# Altium PCB PCB1.PcbDoc
Units mil, origin at the board's own origin, x right, y up, seen from the top; angles counter-clockwise.
Board outline 6000 x 4000 mil, 2 copper layers (Top Layer, Bottom Layer); 41 components, 25 nets, 103 pads, 0 vias.
Unrouted connection lines stored in the file: 69.
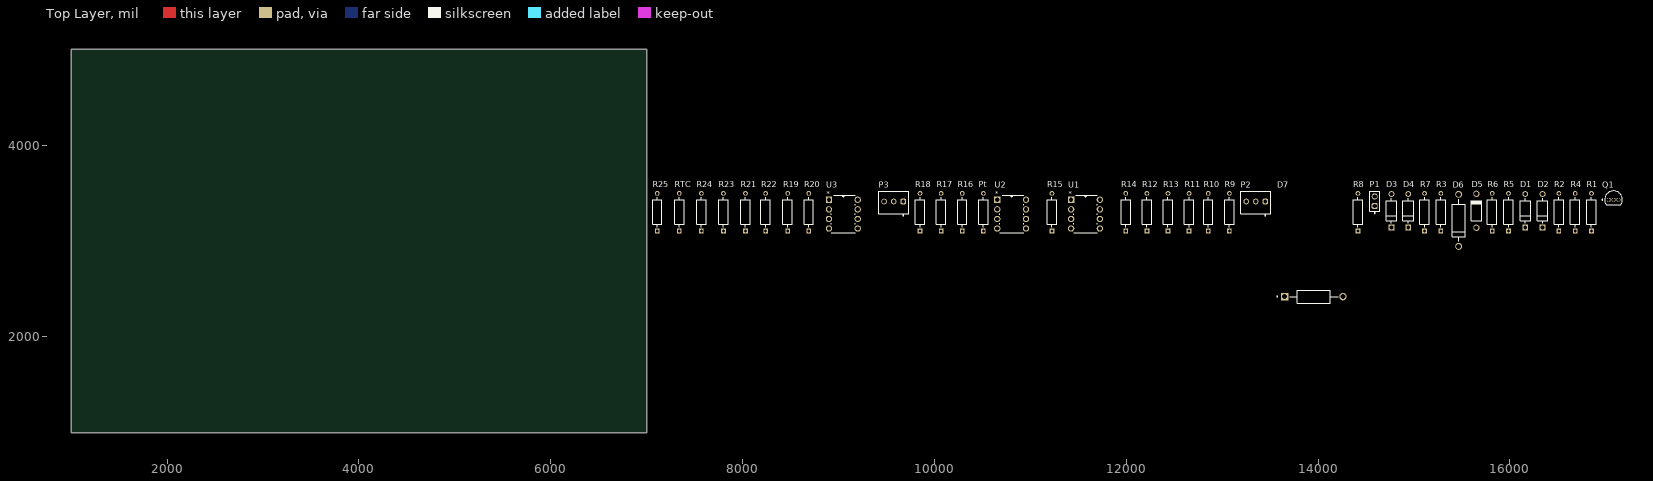
[diagram p0: Top Layer view]
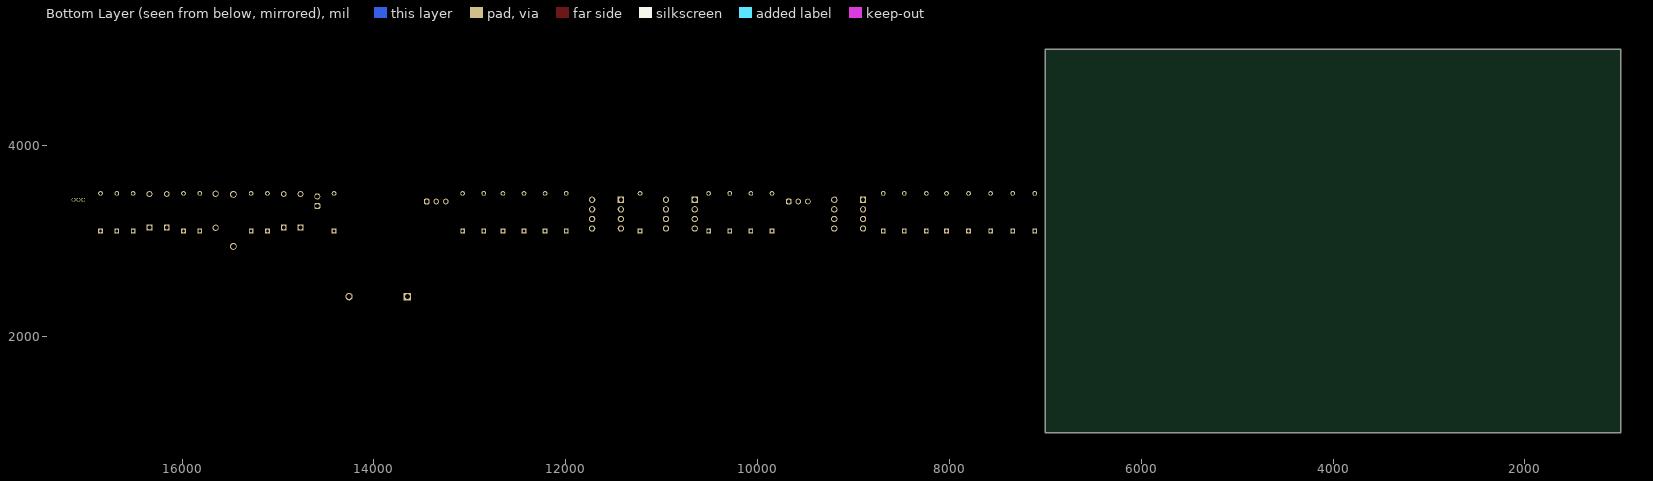
[diagram p1: Bottom Layer view, seen from below]

## Layer stack, top to bottom
Top Solder: solder mask 0.4, Solder Resist, Dk 3.5
Top Layer: signal copper 1.4
Dielectric 1: dielectric 12.6, FR-4, Dk 4.8
Bottom Layer: signal copper 1.4
Bottom Solder: solder mask 0.4, Solder Resist, Dk 3.5

## Board outline
1000,1000 7000,1000 7000,5000 1000,5000

## Design rules (kind name [scope] priority, off if disabled: settings)
Clearance [All] p1: gap=10 ignorepadtopadclearanceinfootprint=FALSE
PolygonConnect [All] p1: connectstyle=Relief reliefconductorwidth=10 reliefentries=4 polygonreliefangle="90 Angle" airgapwidth=10
RoutingVias [All] p1: holewidth=28 width=50 viastyle="Through Hole" minholewidth=28 minwidth=50 maxholewidth=28 maxwidth=50
SolderMaskExpansion [All] p1: expansion=4 istentingtop=FALSE
Width [All] p1: maxlimit=10 minlimit=10 preferedwidth=10
30 further rules are at their usual default settings.

## Components (designator, comment, footprint, x,y, rotation, side; value= is the part's Value field where it differs from the comment)
D1 "1N4007" FP-1N4007-MFG 16160,3315 r90 top value=15pF
D2 "1N4007" FP-1N4007-MFG 16340,3315 r90 top value=15pF
D3 "1N4007" FP-1N4007-MFG 14765,3315 r90 top value=15pF
D4 "1N4007" FP-1N4007-MFG 14940,3315 r90 top value=15pF
D5 "5.6" FAIR-DO-41-2_V 15650,3315 r90 top
D6 "1N5359BRLG" ONSC-SURMETIC40-2-017AA-01 15465,3215 r90 top
D7 "12V" DIOAD1543W101L863D368 13955,2420 r0 top
P1 "61300211121" 61300211121 14590,3415 r90 top
P2 "61900311121" 61900311121 13350,3400 r0 top
P3 "61900311121" 61900311121 9575,3400 r0 top
Pt "10" FP-MRS25-MFG 10510,3300 r90 top
Q1 "P2N2222AG" ONSC-TO-92-3-29-11 17080,3430 r0 top
R1 "100" FP-MRS25-MFG 16850,3300 r90 top
R2 "50" FP-MRS25-MFG 16510,3300 r90 top
R3 "10k" FP-MRS25-MFG 15280,3300 r90 top
R4 "5k" FP-MRS25-MFG 16680,3300 r90 top
R5 "470" FP-MRS25-MFG 15985,3300 r90 top
R6 "2k" FP-MRS25-MFG 15815,3300 r90 top
R7 "10" FP-MRS25-MFG 15110,3300 r90 top
R8 "180" FP-MRS25-MFG 14415,3300 r90 top
R9 "1k" FP-MRS25-MFG 13075,3300 r90 top
R10 "100" FP-MRS25-MFG 12855,3300 r90 top
R11 "100" FP-MRS25-MFG 12655,3300 r90 top
R12 "10k" FP-MRS25-MFG 12215,3300 r90 top
R13 "10k" FP-MRS25-MFG 12435,3300 r90 top
R14 "1k" FP-MRS25-MFG 11995,3300 r90 top
R15 "10k" FP-MRS25-MFG 11225,3300 r90 top
R16 "100" FP-MRS25-MFG 10290,3300 r90 top
R17 "1k" FP-MRS25-MFG 10070,3300 r90 top
R18 "6.6k" FP-MRS25-MFG 9850,3300 r90 top
R19 "10K" FP-MRS25-MFG 8470,3300 r90 top
R20 "10" FP-MRS25-MFG 8690,3300 r90 top
R21 "1k" FP-MRS25-MFG 8030,3300 r90 top
R22 "10k" FP-MRS25-MFG 8240,3300 r90 top
R23 "10k" FP-MRS25-MFG 7800,3300 r90 top
R24 "10k" FP-MRS25-MFG 7570,3300 r90 top
R25 "10K" FP-MRS25-MFG 7110,3300 r90 top
RTC "10K" FP-MRS25-MFG 7340,3300 r90 top
U1 "AD744JNZ" DIP254P762X444-8 11725,3130 r0 top
U2 "AD744JNZ" DIP254P762X444-8 10955,3130 r0 top
U3 "AD744JNZ" DIP254P762X444-8 9200,3130 r0 top

## Footprints (in the part's own frame and the unit in brackets; to place one, negate y for a bottom-side part, rotate by r counter-clockwise, add the part's x,y. Pads: shape width x height; smd on the part's side, far side on the other; paste and mask are expansions set on the pad)
61300211121 [mm] "Pin Header, pitch 2.54 mm, THT, Vertical, single row, 2p"
  rrect50% 1.6x1.6 hole 1.1: 1(-1.27,0)
  round 1.6 hole 1.1: 2(1.27,0)
  silkscreen extent -3.26,-1.35 2.69,1.35, body extent -2.54,-1.27 2.54,1.27, height 8.57
61900311121 [mm] "2.54mm Male Locking Header, 3p"
  rrect50% 1.5x1.5 hole 1: 1(2.54,0.3)
  round 1.5 hole 1: 2(0,0.3) 3(-2.54,0.3)
  silkscreen extent -3.98,-3.52 3.98,2.98, body extent -3.81,-2.9 3.81,2.9, height 11.53
DIOAD1543W101L863D368 [mm]
  rect 1.94x1.94 / inner round 1.94 / far side rect 1.94x1.94 hole 1.29: 1(-7.715,0)
  round 1.94 hole 1.29: 2(7.715,0)
  silkscreen extent -9.78,-1.75 6.43,1.75, body extent -2.25,-34.4 2.25,28.1, height 2.25
DIP254P762X444-8 [mil]
  rect 66x66 / inner round 66 / far side rect 66x66 hole 44: 1(-300,300)
  round 66 hole 44: 2(-300,200) 3(-300,100) 4(-300,0) 5(0,0) 6(0,100) 7(0,200) 8(0,300)
  silkscreen extent -275,-45 -25,345, body extent -162,-189 162,189, height 210
FAIR-DO-41-2_V [mm] "2-Leads, Axial leaded, Body 2.72x5.2mm, Pin Spacing 9mm"
  round 1.65 hole 1.15: 1(-4.5,0) 2(4.5,0)
  silkscreen extent -2.6,-1.36 2.6,1.36, body extent -4.93,-1.36 4.93,1.36, height 2.71
FP-1N4007-MFG [mm]
  rect 1.55x1.55 hole 1 paste-2539.97 mask+0: 1(-4.44,0)
  round 1.55 hole 1 paste-2539.97 mask+0: 2(4.44,0)
  silkscreen extent -3.26,-1.4 3.26,1.4, body extent -5.32,-1.5 5.32,1.5, height 0.25
FP-MRS25-MFG [mm]
  rect 1.25x1.25 hole 0.75 paste-2539.97 mask+0: 1(-5,0)
  round 1.25 hole 0.75 paste-2539.97 mask+0: 2(5,0)
  silkscreen extent -3.98,-1.25 3.98,1.25, body extent -5.72,-1.35 5.72,1.35, height 0.25
ONSC-SURMETIC40-2-017AA-01 [mm] "AXIAL, 2-Leads, Diameter 3.49mm"
  round 1.8 hole 1.3: 1(-6.887,0) 2(6.887,0)
  silkscreen extent -5.59,-1.75 5.59,1.75
ONSC-TO-92-3-29-11 [mm] "TO, 3-Leads, Body Dia 4.7mm, Pitch 1.27mm"
  rect 1.05x1.05 hole 0.8: 1(-1.27,0)
  round 1.05 hole 0.8: 2(0,0) 3(1.27,0)
  silkscreen extent -3.07,-1.34 2.35,2.35, body extent -2.35,-1.33 2.36,2.36, height 7.87

## Part data
D1 D2 D3 D4: library part CMP-123542-000001-1, "Rectifier diode 1000 V 1 A DO-41, ,", Capacitance=15pF, Forward Current=1A, Manufacturer=Diotec, Max Junction Temp=+175°C, Max Repetitive Reverse Voltage=1000V, Max Surge Forward Current=27A, Peak Reverse Current=5uA, Temperature="-50°C to +175°C", Temperature Range Low=-50°C, Automotive=No, Category=Diode, ComponentLink2Description=Datasheet, ComponentLink2URL=https://datasheet.octopart.com/1N4007-Diotec-datasheet-62346875.pdf, Device Class L1="Discrete Semiconductors", Device Class L2=Diodes, Device Class L3="Rectifier Diodes", Height=2.8mm, Ipc Land Pattern Name=DIOAD888W100L520D280, Lead Free=Yes, Manufacturer Part Number=1N4007, Octopart=https://octopart.com/1n4007-diotec-4040411, Package=1N4007, Reverse Voltage=1000V, RoHS=TRUE, Temperature Range High=+175°C
D5: library part CMP-0892-00009-1, "Zener Diode, 5.6V, 1W, 5%, -65 to 200 degC, 2-Pin DO-41, Body 2.72 x 5.2 mm, RoHS", Manufacturer="Fairchild Semiconductor", Operating and Storage Temperature Range="-65 to 200 degC", PartNumber=1N4734A, Test Current IZ (mA)=45, Tolerance=5%, ComponentLink1Description="Manufacturer URL", ComponentLink1URL=http://www.fairchildsemi.com/, ComponentLink2Description=Datasheet, ComponentLink2URL=http://www.fairchildsemi.com/ds/1N/1N4744A.pdf, ComponentLink3Description="Package Specification", ComponentLink3URL=http://www.fairchildsemi.com/dwg/DO/DO41A.pdf, DatasheetVersion="Rev. H3", IR (uA)=10, Mounting Technology="Through Hole", PackageDescription="2-Pin Axial leaded, Body 2.72 x 5.2 mm, Lead Spread 25.4 mm", PackageReference=DO-41-2, PackageVersion="Rev. 2", PD (W)=1, RoHS=TRUE, VZ (Max.) (V)=5.88, VZ (Min.) (V)=5.32, ZZ (Max) (ohm)=5
D6: library part CMP-1060-01318-1, "5 W Zener Voltage Regulator, 2-Pin Surmetic(TM) 40, Pb-Free, Tape and Reel", Manufacturer="On Semiconductor", ComponentLink1Description="Manufacturer URL", ComponentLink1URL=http://www.onsemi.com/, ComponentLink2Description=Datasheet, ComponentLink2URL=http://www.onsemi.cn/pub_link/Collateral/1N5333B-D.PDF, ComponentLink3Description="Package Specification", ComponentLink3URL=http://www.onsemi.cn/pub_link/Collateral/017AA.PDF, DatasheetVersion="Rev. 14", Mounting Technology="Through Hole", P Max (W)=5, PackageDescription="2-Pin, Axial Lead, Diameter 3.49 mm", PackageReference=SURMETIC40-2-017AA-01, PackageVersion="Rev. O, 09/2005", Packing="Tape and Reel", PartNumber=1N5359BRLG, RoHS=Pb-Free, VZ Typ (V)=24
D7: library part 1N5349BRL, "Zener Diode Single 12V 5% 2.5Ohm 5000mW 2-Pin Case 017AA-01 T/R", Package=None, Check_prices=https://www.snapeda.com/parts/1N5349BRL/Onsemi/view-part/?ref=eda, MF="ON Semiconductor", MP=1N5349BRL, SnapEDA_Link=https://www.snapeda.com/parts/1N5349BRL/Onsemi/view-part/?ref=snap
P1: library part CMP-1712-00002-6, Color=Black, Contact Resistance=20mΩ, Current Rating=3A, Max Operating Temperature=125°C, Min Operating Temperature=-40°C, Operating Supply Voltage=250V, Connector Type="Male Pin", Contact Gender=Male, Contact Material=Copper, Contact Mating Length=5.9944mm, Contact Plating=Gold, Gender=Male, Height=8.94mm, Housing Material=PBT, Lead Free="Lead Free", Lead Pitch=2.54mm, Mount="Through Hole", NexarPartId=20081794, Number of Contacts=2, Number of Pins=2, Number of Positions=2, Number of Rows=1, Orientation=Vertical, Packaging=Bulk, Pitch=2.54mm, REACH SVHC="No SVHC", RoHS=Compliant, Termination="Through Hole", Voltage Rating=250V
P2 P3: library part CMP-1502-00585-2, Color=Beige, Contact Resistance=20mΩ, Current Rating=3A, Flammability Rating="UL94 V-0", Insulation Resistance=1GΩ, Max Operating Temperature=105°C, Min Operating Temperature=-40°C, Operating Supply Voltage=250V, Connector Type="Male Pin", Contact Gender=Male, Contact Material=Copper, Contact Mating Length=7.493mm, Contact Plating=Tin, Fastening Type=Friction, Gender=Male, Height=12.5mm, Housing Material=Nylon, Lead Pitch=2.54mm, Length=7.62mm, Mount="Through Hole", NexarPartId=18818222, Number of Contacts=3, Number of Pins=3, Number of Positions=3, Number of Rows=1, Orientation=Vertical, Packaging=Bulk, Pitch=2.54mm, REACH SVHC=Unknown, RoHS=Compliant, Termination="Through Hole", Voltage Rating=250V, Width=7.66mm
Pt R1 R2 R3 R4 R5 R6 R7 R8 R9 R10 R11 R12 R13 R14 R15 R16 R17 R18 R19 R20 R21 R22 R23 R24 R25 RTC: library part CMP-00030-42757237-1, "MRS25000C1000FRP00 Resistor, 100 Ohm, ± 1%, 600 mW, Axial Leaded, Metal Film (Thin Film), Professional", Case/Package=Axial, Max Operating Temperature=155°C, Max Power Dissipation=600mW, Min Operating Temperature=-55°C, Resistance=100Ω, Temperature Coefficient=50ppm/°C, Tolerance=1%, Voltage Rating=350V, Composition="Metal Film, Thin Film", Contact Plating=Tin, Diameter=2.5mm, Lead Diameter=600µm, Lead Free="Lead Free", Length=6.5mm, Military Standard=Not, Mount="Through Hole", NexarPartId=42757237, Number of Pins=2, Number of Terminations=2, Packaging="Tape & Reel (TR)", Power Rating=600mW, Radiation Hardening=No, REACH SVHC=Unknown, RoHS=Compliant, Schedule B="8533210090, 8533210090", Termination=Axial, Voltage Rating (DC)=350V, Width=2.5mm
Q1: library part CMP-1048-01402-1, "Amplifier Transistor, NPN Silicon, 3-Pin TO-92, Pb-Free, Bulk Box", Manufacturer="On Semiconductor", ComponentLink1Description="Manufacturer URL", ComponentLink1URL=http://www.onsemi.com/, ComponentLink2Description=Datasheet, ComponentLink2URL=http://www.onsemi.com/pub_link/Collateral/P2N2222A-D.PDF, ComponentLink3Description="Package Specification", ComponentLink3URL=http://www.onsemi.cn/pub_link/Collateral/2N6426-D.PDF, DatasheetVersion="Rev. 7", fT Min (MHz)=300, IC Continuous (A)=0.6, Mounting Technology="Through Hole", PackageDescription="3-Pin Transistor Outline, Body 4.825 x 3.685 mm, Pitch 1.27 mm", PackageReference=TO-92-3-29-11_AM_SL, PackageVersion="Rev. AM", Packing="Bulk Box", PartNumber=P2N2222AG, Polarity=NPN, RoHS=TRUE
U1 U2 U3: "Precision, 500 ns Settling BiFET Op Amp", Package="PDIP-8 Analog Devices", Check_prices=https://www.snapeda.com/parts/AD744JNZ/Analog+Devices/view-part/?ref=eda, MF="Analog Devices", MP=AD744JNZ, SnapEDA_Link=https://www.snapeda.com/parts/AD744JNZ/Analog+Devices/view-part/?ref=snap

## Nets (pads, with @x,y where several pads share a name; then routed paths per layer and width w, separated by ;. In a path a pad name is that pad's centre, name@x,y a point inside that pad or via, vN(x,y) a via of type N, cw(c..) or ccw(c..) an arc to the next point about the centre after c; other vN are vias at no path point)
5V: P2.1 Q1.3 R5.2 R10.2 R11.2 R19.2 R20.2
+VSS: Q1.1 R2.1 R3.2 R4.2 R6.2 U1.7 U2.7 U3.7
-VSS: D3.2 D4.2 D6.1 D6.2 D7.2 R1.2 R2.2 R3.1 R8.1 U1.4 U2.4 U3.4
GND: D2.2 D4.1 P1.2 P2.2 Pt.1 R16.1 R23.2 R25.1 RTC.1
NetC1_N: D5.1 R5.1 R6.1 R7.2 R8.2
NetC3_P: D1.1 D2.1 R1.1
NetC4_P: R9.1
NetC5_P: P3.1 R14.1
NetC6_P: R17.1 U1.3
NetC7_P: P3.2 R21.1
NetD1_2: D1.2 D3.1 P1.1
NetD5_2: D5.2 Q1.2 R4.1
NetD7_1: D7.1 R7.1
NetP2_3: P2.3 R13.2 U2.6
NetP3_3: P3.3 U3.3
NetPt_2: Pt.2 R11.1 R14.2
NetR9_2: R9.2 R10.1 R16.2
NetR12_1: R12.1 R15.1 U1.6
NetR12_2: R12.2 R13.1 U2.2
NetR15_2: R15.2 R18.1 U1.2
NetR17_2: R17.2 R19.1 R25.2
NetR18_2: R18.2 R24.1 U3.2
NetR20_1: R20.1 R21.2 RTC.2
NetR22_1: R22.1 R24.2 U3.6
NetR22_2: R22.2 R23.1 U2.3
pads on no net: U1.1 U1.5 U1.8 U2.1 U2.5 U2.8 U3.1 U3.5 U3.8

## Text inside footprints (layer, text, board x,y; h text height)
U1: Top 3D Body "*" at 11401.58,3474.44 h50.06; Top Overlay "*" at 11401.93,3474.08 h50.01
U2: Top 3D Body "*" at 10631.58,3474.44 h50.06; Top Overlay "*" at 10631.93,3474.08 h50.01
U3: Top 3D Body "*" at 8876.58,3474.44 h50.06; Top Overlay "*" at 8876.93,3474.08 h50.01